# Altium PCB DashDAP.PcbDoc
Units mil, origin at the board's own origin, x right, y up, seen from the top; angles counter-clockwise.
Board outline 6000 x 4000 mil, 2 copper layers (Top Layer, Bottom Layer); 30 components, 25 nets, 120 pads, 0 vias.
Unrouted connection lines stored in the file: 67.
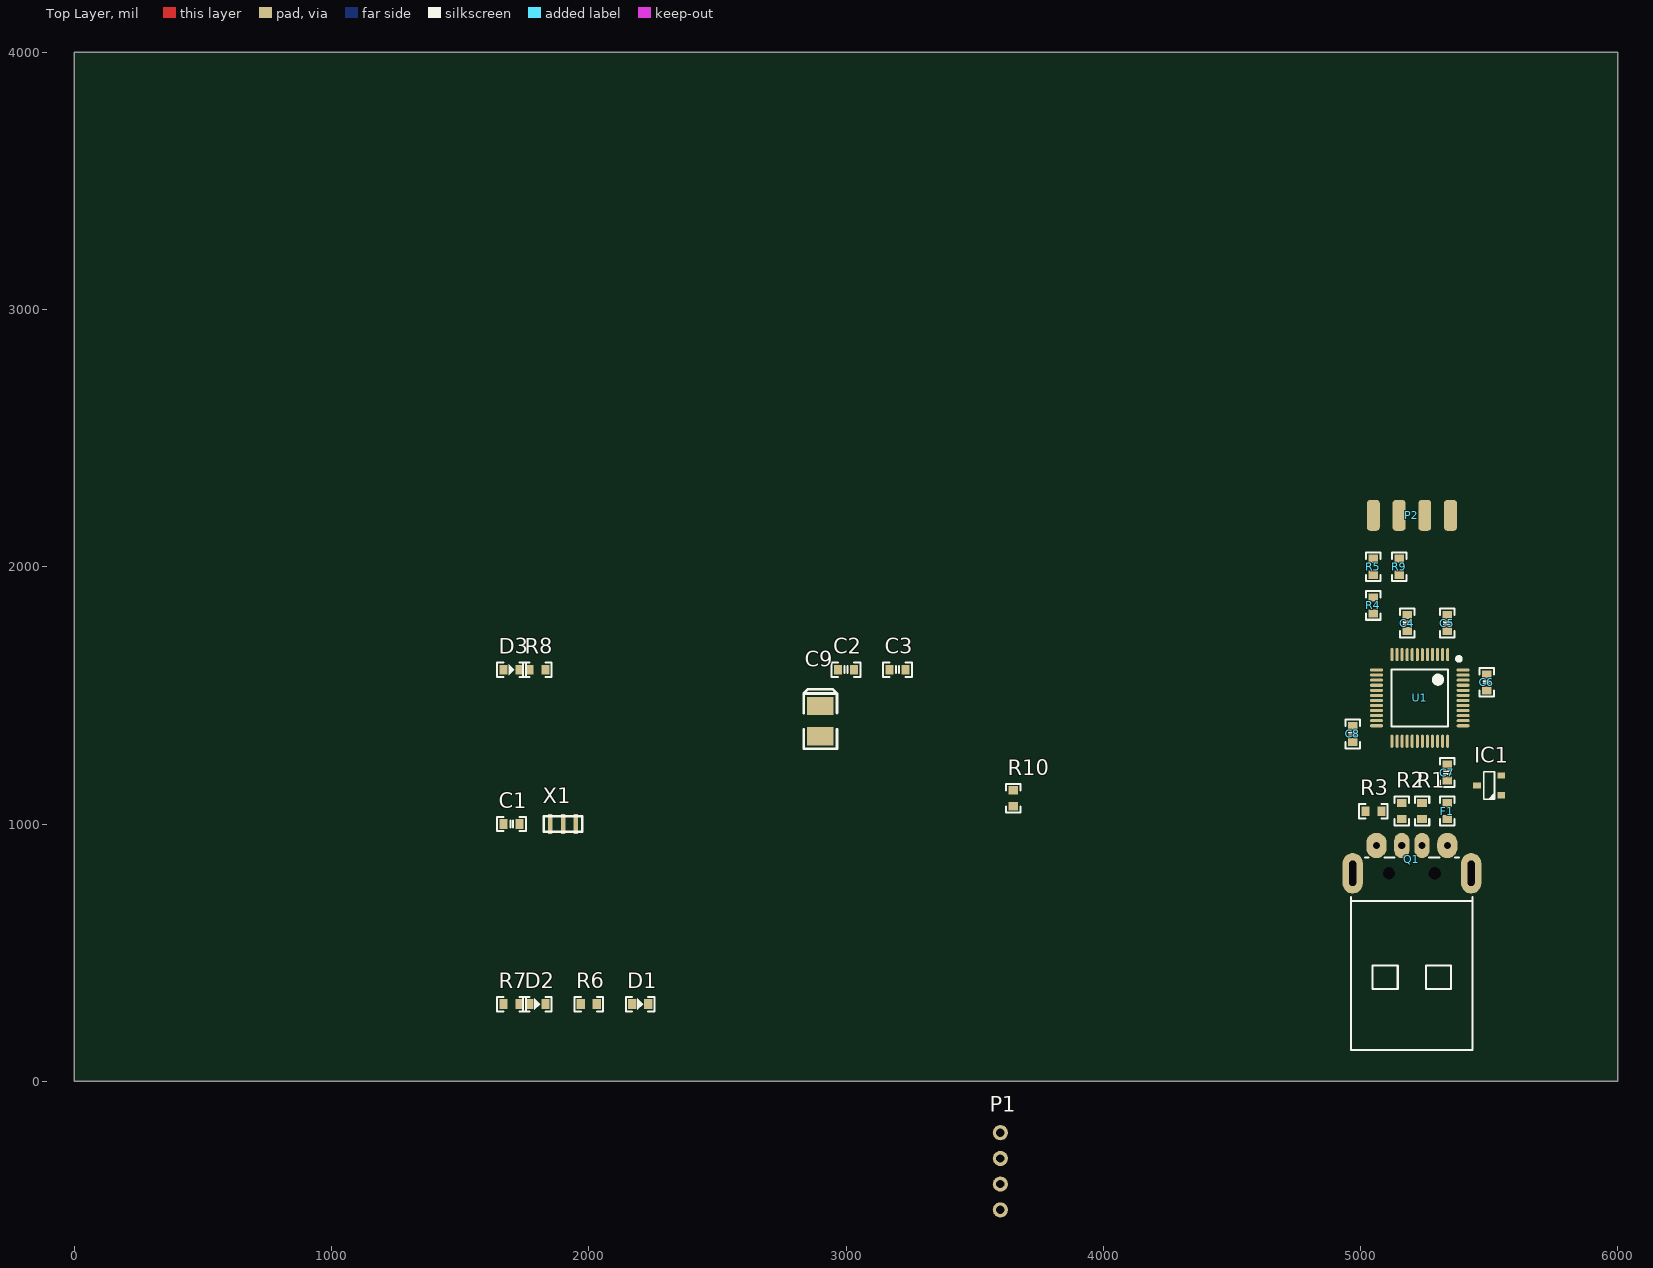
[diagram p0: Top Layer view]
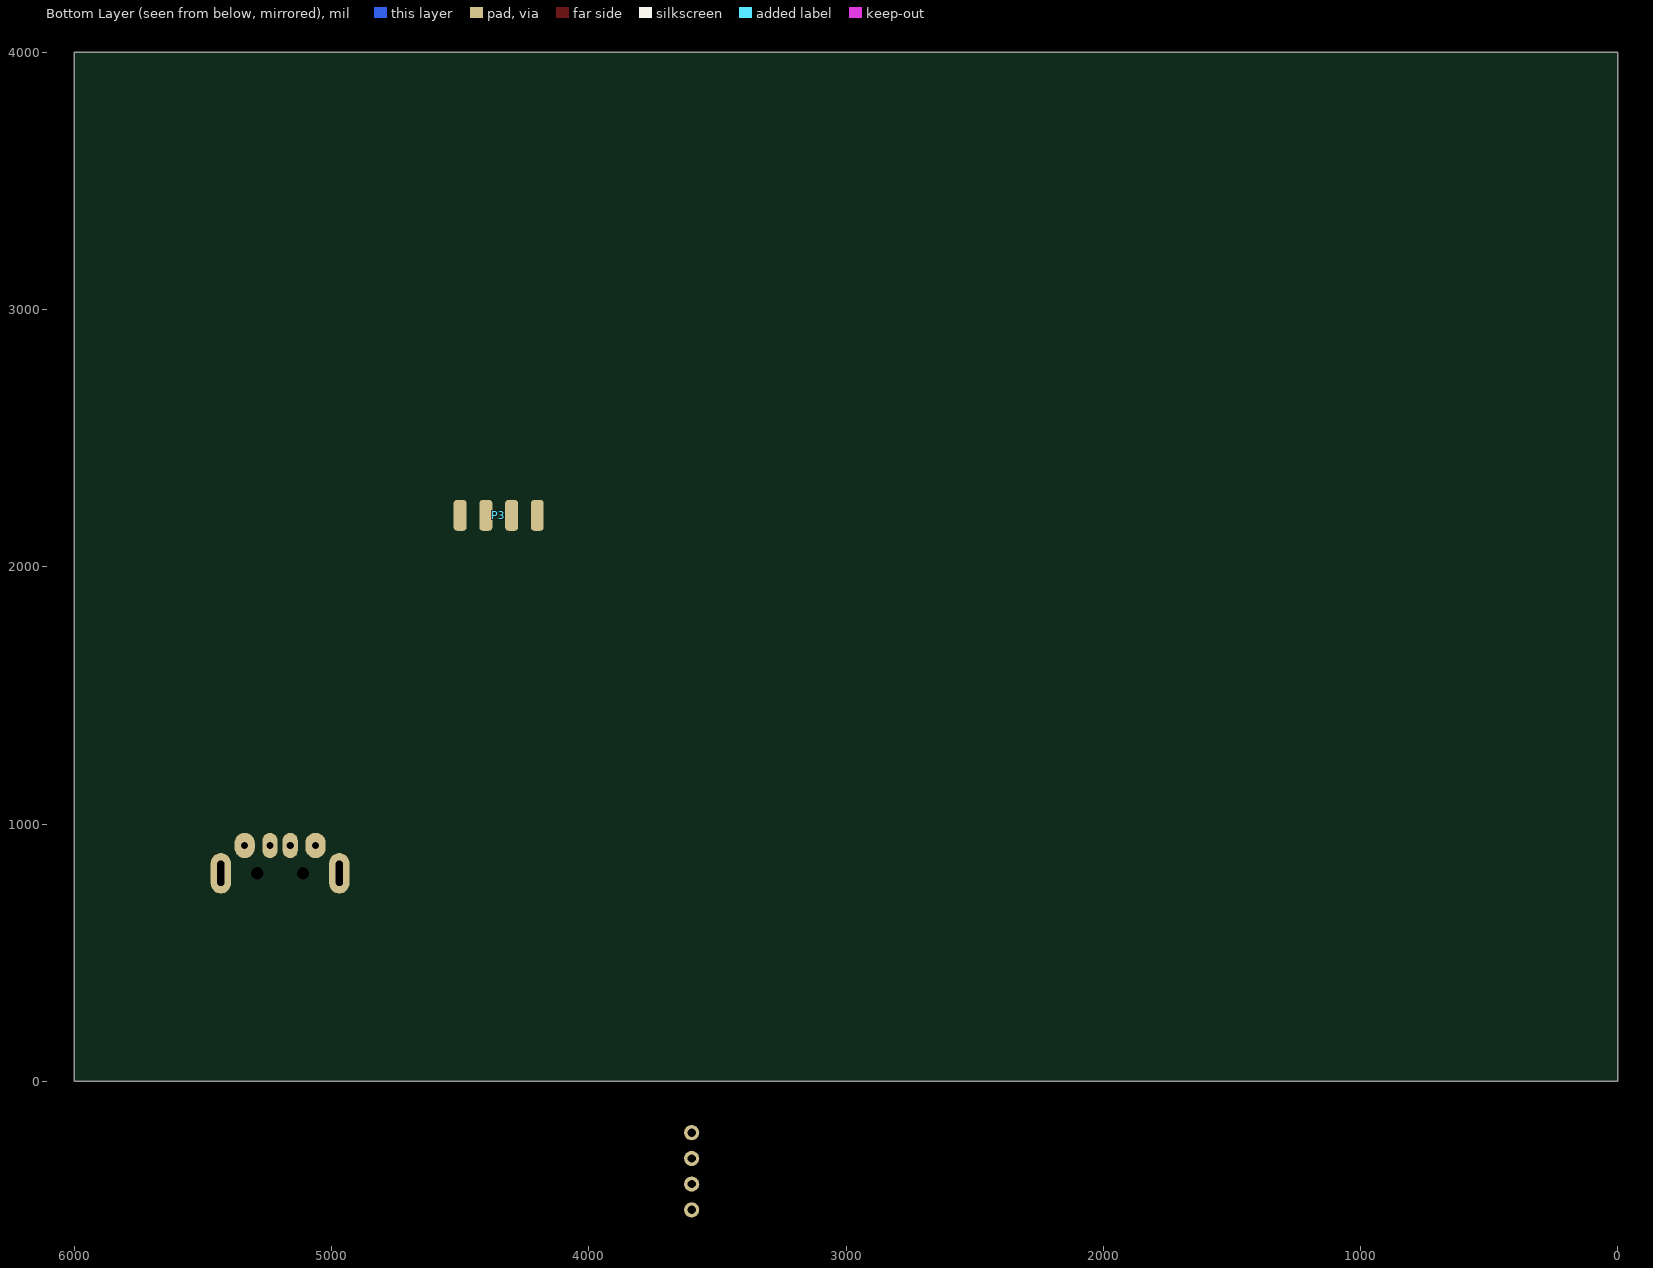
[diagram p1: Bottom Layer view, seen from below]

## Layer stack, top to bottom
Top Solder: solder mask 0.4, Solder Resist, Dk 3.5
Top Layer: signal copper 1.4
Dielectric 1: dielectric 12.6, FR-4, Dk 4.8
Bottom Layer: signal copper 1.4
Bottom Solder: solder mask 0.4, Solder Resist, Dk 3.5

## Board outline
0,0 6000,0 6000,4000 0,4000

## Design rules (kind name [scope] priority, off if disabled: settings)
Clearance [All] p1: gap=10 ignorepadtopadclearanceinfootprint=FALSE except(0: Arc-Hole Track-Hole SMDPad-Hole THPad-Hole Via-Hole Fill-Hole Poly-Hole Region-Hole Text-Hole)
DiffPairsRouting [All] p1: maxlimit=10 minlimit=10 mostfreqgap=10 toplayer_minwidth=15 toplayer_maxwidth=15 toplayer_prefwidth=15 bottomlayer_minwidth=15 bottomlayer_maxwidth=15 bottomlayer_prefwidth=15 maxuncoupledlength=500
PlaneConnect [All] p1: planeconnectstyle=Direct reliefexpansion=20 reliefentries=4 reliefconductorwidth=10 reliefairgap=10
PolygonConnect [All] p1: connectstyle=Direct reliefconductorwidth=10 reliefentries=4 polygonreliefangle="90 Angle" airgapwidth=10
RoutingVias [All] p1: holewidth=17.72 width=29.53 viastyle="Through Hole" minholewidth=17.72 minwidth=29.53 maxholewidth=17.72 maxwidth=29.53
SolderMaskExpansion [All] p1: expansion=4 istentingtop=FALSE
Width [All] p1: maxlimit=50 minlimit=12 preferedwidth=12
28 further rules are at their usual default settings.

## Classes and differential pairs
component class U_Power: C2 C3 C4 C5 C6 C7 C8 C9 D3 IC1 R8
component class U_MCU: C1 U1 X1
component class U_Dev: D1 D2 F1 P1 P2 P3 Q1 R1 R2 R3 R4 R5 R6 R7 R9 R10
differential pair USB: +USB_P -USB_N

## Components (designator, comment, footprint, x,y, rotation, side; value= is the part's Value field where it differs from the comment)
C1 "100nF" CAP-0603 1700,1000 r0 top
C2 "1uF" CAP-0603 3000,1600 r0 top
C3 "1uF" CAP-0603 3200,1600 r0 top
C4 "100nF" CAP-0603 5181.49,1781.1 r270 top
C5 "100nF" CAP-0603 5337.8,1781.1 r270 top
C6 "100nF" CAP-0603 5491.34,1550.79 r90 top
C7 "100nF" CAP-0603 5337.8,1200 r90 top
C8 "100nF" CAP-0603 4970.06,1350 r90 top
C9 "10uF" CASE-B_3528 2900,1400 r90 top
D1 "RED" LED-0603 2200,300 r0 top
D2 "GREEN" LED-0603 1800,300 r0 top
D3 "RED" LED-0603 1700,1600 r0 top
F1 "Fuse" R-0603 5337.8,1050 r90 top
IC1 "ME6211A33M3G-N" SOT-23-3 5500,1150 r0 top
P1 "HDR1x4_2.54" HDR1x4_2.54_180 3600,-200 r0 top
P2 "HDR1x4_2.54" HDR1X4_2.54_180H 5050,2200 r90 top
P3 "HDR1x4_2.54" HDR1X4_2.54_180H 4500,2200 r90 bottom
Q1 "USB A" USB_A(M)_DIP 5200,700 r0 top
R1 "22R" R-0603 5239.37,1050 r90 top
R2 "22R" R-0603 5160.63,1050 r90 top
R3 "1.5K" R-0603 5050,1050 r0 top
R4 "1R" R-0603 5050,1850 r270 top
R5 "22R" R-0603 5050,2000 r90 top
R6 "10K" R-0603 2000,300 r0 top
R7 "10K" R-0603 1700,300 r0 top
R8 "10K" R-0603 1800,1600 r0 top
R9 "22R" R-0603 5150.79,2000 r90 top
R10 "1R" R-0603 3650,1100 r90 top
U1 "STM32F103C8T6" LQFP_48 5230.7,1490.16 r180 top
X1 "8MHz" CSTCE_G(A)村田晶振 1900,1000 r0 top

## Footprints (in the part's own frame and the unit in brackets; to place one, negate y for a bottom-side part, rotate by r counter-clockwise, add the part's x,y. Pads: shape width x height; smd on the part's side, far side on the other; paste and mask are expansions set on the pad)
CAP-0603 [mm]
  rect 0.8x0.96 smd: 1(-0.79,0) 2(0.79,0)
  silkscreen extent -1.42,-0.71 1.42,0.71, body extent -0.76,-0.39 0.76,0.39, height 0.9
CASE-B_3528 [mm]
  rect 1.8x2.6 smd: 1(1.5,0) 2(-1.5,0)
  silkscreen extent -2.73,-1.65 3.16,1.65, body extent -1.85,-1.47 1.85,1.46, height 2.03
CSTCE_G(A)村田晶振 [mm]
  rrect50% 0.45x2 smd: 1(1.27,0) 2(0,0) 3(-1.27,0)
  silkscreen extent -1.91,-0.76 1.91,0.76, body extent -1.9,-0.8 1.9,0.8, height 1
HDR1x4_2.54_180 [mm]
  round 1.5 hole 0.813: 1(0,0) 2(0,-2.54) 3(0,-5.08) 4(0,-7.62)
  body extent -1.25,-8.89 1.25,1.27, height 8.2
HDR1X4_2.54_180H [mil]
  rrect50% 120x50 smd: 1(0,0) 2(0,-100) 3(0,-200) 4(0,-300)
  body extent -35,-350 406,50, height 61
LED-0603 [mm]
  rect 0.8x0.96 smd: 1(-0.79,0) 2(0.79,0)
  silkscreen extent -1.42,-0.71 1.42,0.71, body extent -0.81,-0.4 0.81,0.4, height 0.6
LQFP_48 [mm]
  oval 0.3x1.3 smd: 1(-2.75,-4.28) 2(-2.25,-4.28) 3(-1.75,-4.28) 4(-1.25,-4.28) 5(-0.75,-4.28) 6(-0.25,-4.28) 7(0.25,-4.28) 8(0.75,-4.28) 9(1.25,-4.28) 10(1.75,-4.28) 11(2.25,-4.28) 12(2.75,-4.28) 25(2.75,4.28) 26(2.25,4.28) 27(1.75,4.28) 28(1.25,4.28) 29(0.75,4.28) 30(0.25,4.28) 31(-0.25,4.28) 32(-0.75,4.28) 33(-1.25,4.28) 34(-1.75,4.28) 35(-2.25,4.28) 36(-2.75,4.28)
  oval 1.3x0.3 smd: 13(4.28,-2.75) 14(4.28,-2.25) 15(4.28,-1.75) 16(4.28,-1.25) 17(4.28,-0.75) 18(4.28,-0.25) 19(4.28,0.25) 20(4.28,0.75) 21(4.28,1.25) 22(4.28,1.75) 23(4.28,2.25) 24(4.28,2.75) 37(-4.28,2.75) 38(-4.28,2.25) 39(-4.28,1.75) 40(-4.28,1.25) 41(-4.28,0.75) 42(-4.28,0.25) 43(-4.28,-0.25) 44(-4.28,-0.75) 45(-4.28,-1.25) 46(-4.28,-1.75) 47(-4.28,-2.25) 48(-4.28,-2.75)
  silkscreen extent -3.98,-3.99 2.8,2.8, body extent -4.5,-4.5 4.5,4.5, height 1.52
R-0603 [mm]
  rect 0.8x0.96 smd: 1(-0.79,0) 2(0.79,0)
  silkscreen extent -1.42,-0.71 1.42,0.71, body extent -0.76,-0.38 0.76,0.38, height 0.41
SOT-23-3 [mil]
  rect 30x24 smd: 1(47,-38) 2(47,38) 3(-47,0)
  silkscreen extent -21,-53 21,53, body extent -55,-57 55,57, height 51
USB_A(M)_DIP [mm]
  oval 2x4 hole 0.7 slot 2.5 at 90 deg: 0(-5.85,2.75) 0(5.85,2.75)
  round 0.2 hole 1.2: 0(-2.25,2.75) 0(2.25,2.75)
  oval 2x2.5 hole 0.7: 1(3.5,5.5) 4(-3.5,5.5)
  oval 1.5x2.5 hole 0.7: 2(1,5.5) 3(-1,5.5)
  silkscreen extent -6,-14.7 6,4.3

## Part data
C1 C2 C3 C4 C5 C6 C7 C8: library part CAP, "贴片电容", Package=0402, SuppliersPartNumber=C52923, ComponentLink1Description=供应商链接, ComponentLink1URL=http://www.szlcsc.com/product/details_53938.html, Supplier=LC
C9: library part CAP-POL, "贴片电容-有极性", Package=3528, SuppliersPartNumber=C16133, ComponentLink1Description=供应商链接, ComponentLink1URL=http://www.szlcsc.com/product/details_16815.html, Supplier=LC
D1 D2 D3: library part LED, "发光二极管", Package=0603, SuppliersPartNumber=C2290, ComponentLink1Description=供应商链接, ComponentLink1URL=http://www.szlcsc.com/product/details_2663.html, Supplier=LC
F1: "6V 500mA 保险丝"
IC1: "线性稳压", Manufacturer_Name=Nexperia, Manufacturer_Part_Number=SI2302DS, Mouser Part Number=N/A, RS Part Number=7983053P, Datasheet Link=https://assets.nexperia.com/documents/data-sheet/SI2302DS.pdf, Height=1.1mm, Mouser Price/Stock=https://www.mouser.com/Search/Refine.aspx?Keyword=N%2FA, RS Price/Stock=http://uk.rs-online.com/web/p/products/7983053P
P1 P2 P3: "Header"
Q1: "USB 接口"
R1 R2 R3 R4 R5 R6 R7 R8 R9 R10: library part RES, "贴片电阻", Package=0805, SuppliersPartNumber=C17798, Supplier=LC
U1: library part STM32F103Cx, "单片机", I/Os (High Current)=37, Operating Frequency(F) (Processor speed) (MHz)=24, PartNumber=STM32F100C8T6B, Supplier Part Number 1=497-10499-ND, Supply Voltage(Vcc) min (V)=2, A/D Converter="1x12-bit (10 Channel)", ComponentLink1Description="Manufacturer URL", ComponentLink1URL=http://www.st.com/web/en/home.html, ComponentLink2Description=Datasheet, ComponentLink2URL=http://www.st.com/st-web-ui/static/active/en/resource/technical/document/datasheet/CD00251732.pdf, ComponentLink3Description="Package Specification", ComponentLink3URL=http://www.st.com/st-web-ui/static/active/en/resource/technical/document/datasheet/DM00058181.pdf, Core="ARM Cortex-M3", D/A Converter="2x12-bit (2 Channel)", DatasheetVersion="Rev. 7", FLASH Size (Prog) (kB)=64, Internal RAM Size (kB)=8, Mounting Technology="Surface Mount", PackageDescription="48-Pin Low Profile Quad Flat Package, 7 x 7 mm Body, 0.5 mm Pitch", PackageReference=LQFP48, PackageVersion="Rev. 6, 06/2013", Packing=Tray, Supplier 1=Digi-Key, Supplier 2=Farnell, Supplier 3=Newark, Supplier 4=Mouser, Supplier Part Number 2=1838511, Supplier Part Number 3=76R0988, Supplier Part Number 4=511-STM32F100C8T6B
X1: library part XTAL, "有源晶振"

## Nets (pads, with @x,y where several pads share a name; then routed paths per layer and width w, separated by ;. In a path a pad name is that pad's centre, name@x,y a point inside that pad or via, vN(x,y) a via of type N, cw(c..) or ccw(c..) an arc to the next point about the centre after c; other vN are vias at no path point)
3.3V: C3.2 C4.2 C5.2 C6.2 C7.2 C8.2 C9.1 IC1.3 P1.4 P2.4 R3.1 R4.2 R8.2 R10.1 U1.1 U1.9 U1.24 U1.36 U1.48
5V: C2.2 F1.2 IC1.1 P3.1
GND: C1.2 C2.1 C3.1 C4.1 C5.1 C6.1 C7.1 C8.1 C9.2 D1.2 D2.2 D3.2 IC1.2 P1.3 P2.3 Q1.4 U1.8 U1.23 U1.35 U1.44 U1.47 X1.2
NetC1_1: C1.1 U1.7
NetD1_A: D1.1 R6.1
NetD2_A: D2.1 R7.1
NetD3_A: D3.1 R8.1
NetF1_1: F1.1 Q1.1
NetP1_1: P1.1 U1.37
NetP1_2: P1.2 U1.34
NetP2_1: P2.1 R5.2
NetP2_2: P2.2 R9.2
NetP3_2: P3.2 U1.16
NetP3_3: P3.3 U1.31
NetP3_4: P3.4 U1.30
NetQ1_2: Q1.2 R1.1
NetQ1_3: Q1.3 R2.1
NetR4_1: R4.1 R5.1 U1.14
NetR6_2: R6.2 U1.25
NetR7_2: R7.2 U1.45
NetR9_1: R9.1 R10.2 U1.12
NetU1_5: U1.5 X1.1
NetU1_6: U1.6 X1.3
USB_N: R1.2 U1.32
USB_P: R2.2 R3.2 U1.33
pads on no net: Q1.0 U1.2 U1.3 U1.4 U1.10 U1.11 U1.13 U1.15 U1.17 U1.18 U1.19 U1.20 U1.21 U1.22 U1.26 U1.27 U1.28 U1.29 U1.38 U1.39 U1.40 U1.41 U1.42 U1.43 U1.46